# Altium PCB lab2_vodorezov_buck.PcbDoc
Units mm, origin at the board's own origin, x right, y up, seen from the top; angles counter-clockwise.
Board outline 77.5 x 40 mm, 2 copper layers (Top Layer, Bottom Layer), stack 1.57 mm thick; 32 components, 19 nets, 122 pads, 99 vias.
Unrouted connection lines stored in the file: 32.
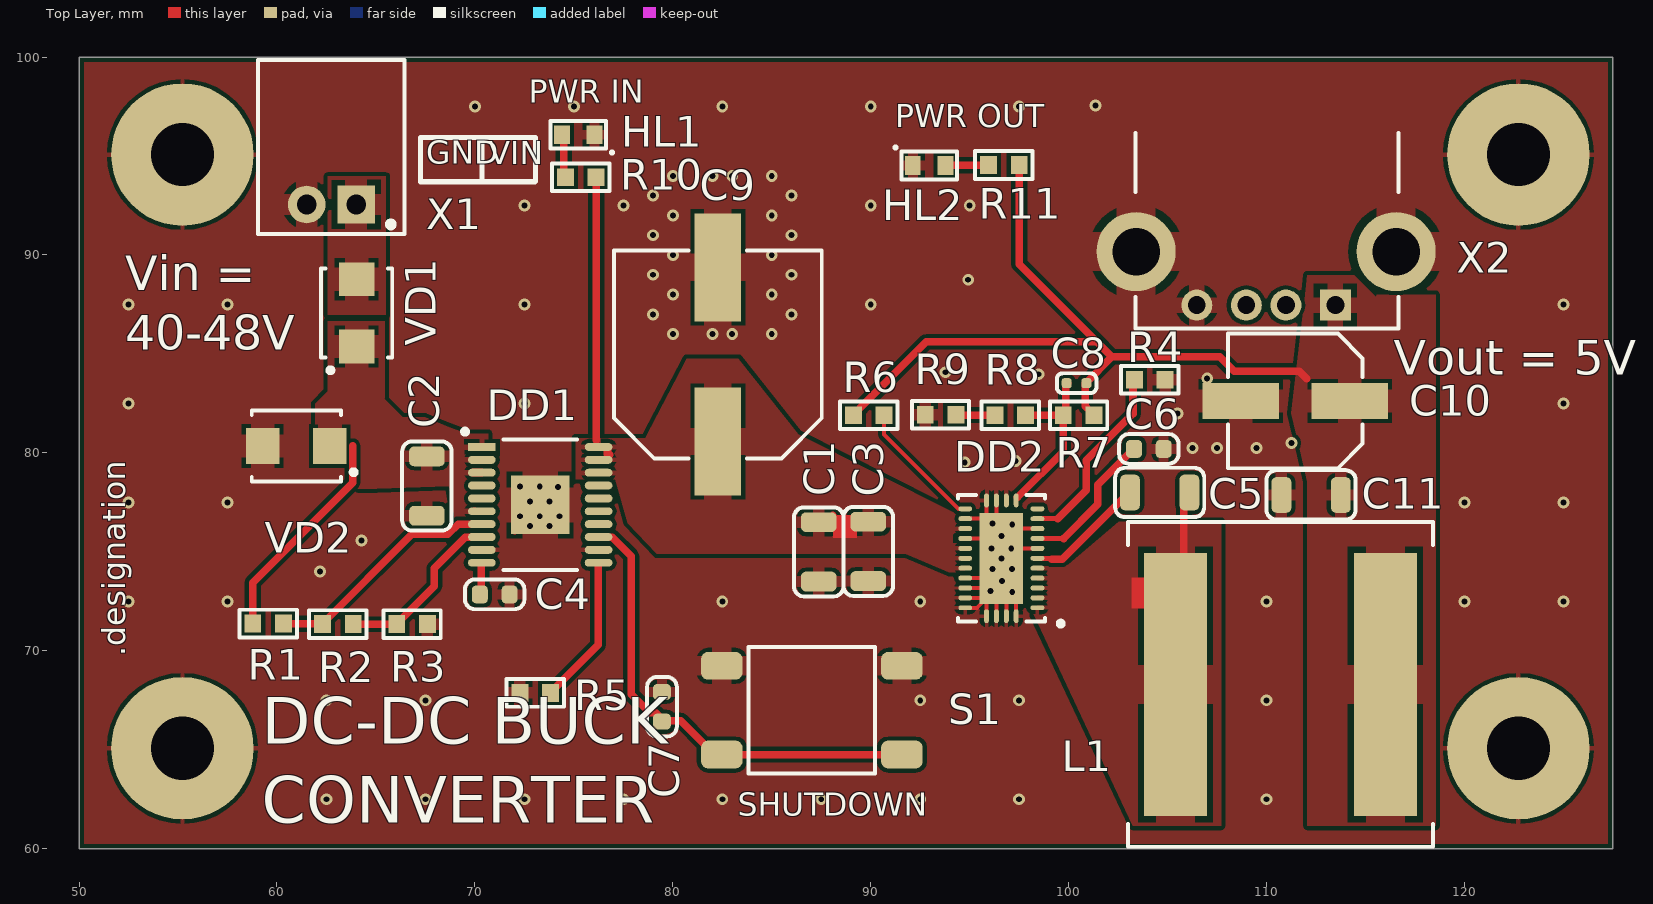
[diagram p0: Top Layer view]
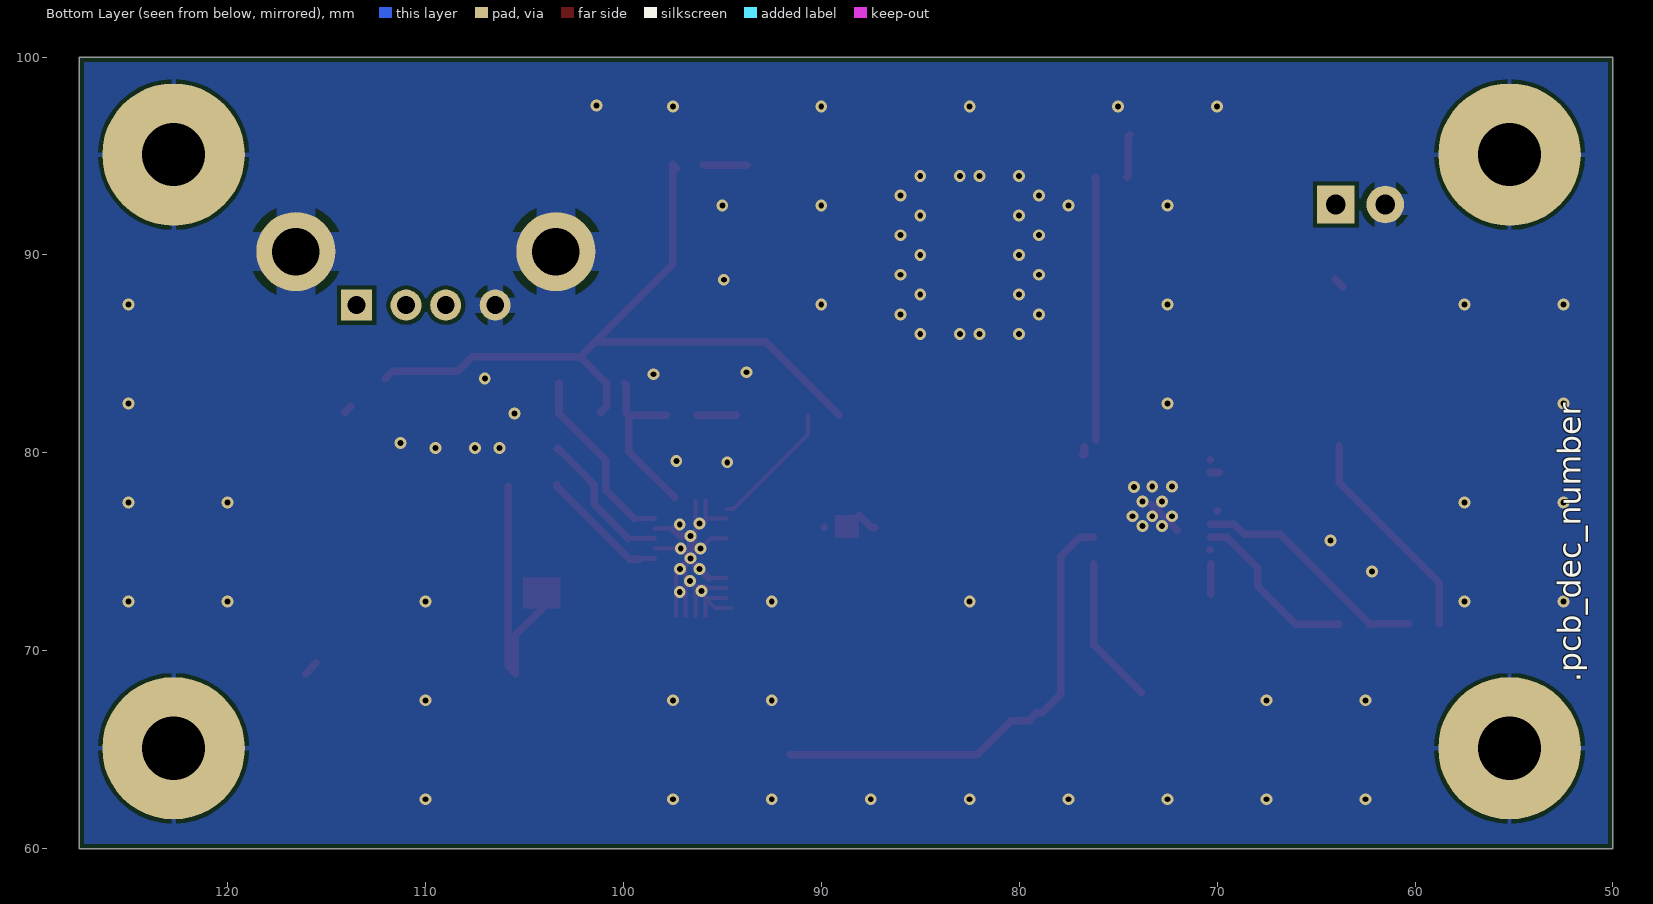
[diagram p1: Bottom Layer view, seen from below]
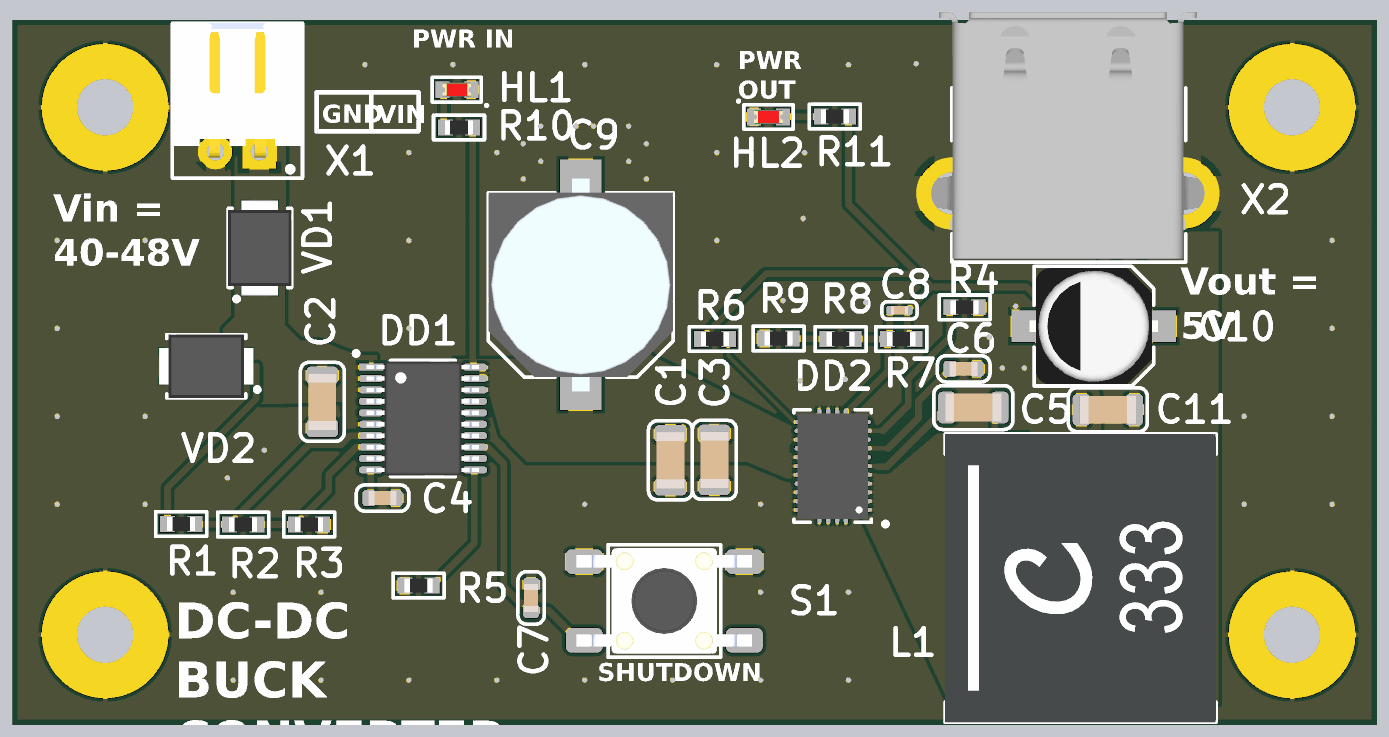
[diagram p2: 3D render of the assembled board from above, using the file's embedded part models]

## Layer stack, top to bottom
Top Solder: solder mask 0.0102, Solder Resist, Dk 3.5
Top Layer: signal copper 0.035
Core 1: core 1.5, FR4, Dk 4.6
Bottom Layer: signal copper 0.035
Bottom Solder: solder mask 0.0102, Solder Resist, Dk 3.5

## Board outline
50,60 127.5,60 127.5,100 50,100

## Design rules (kind name [scope] priority, off if disabled: settings)
AcuteAngle min_acute_angle [OnCopper] p1: minimum=3.50000000000000E+0001 checktracksonly=FALSE // Минимальный угол между примитивами топологии
BoardOutlineClearance board_outline_clearance_std [NOT (OnLayer('Bottom Overlay') OR OnLayer('Top Overlay'))] p1: gap=0.25 ignorepadtopadclearanceinfootprint=FALSE except(0: Arc-SplitContinuation Track-SplitContinuation SMDPad-SplitContinuation THPad-SplitContinuation Via-SplitContinuation Fill-SplitContinuation Poly-SplitContinuation Region-SplitContinuation Text-SplitContinuation) // Отступ элементов топологии от края фрезеруемой печатной платы
Clearance clearance_outer_35um_std [OnTopLayer OR OnBottomLayer] p1: gap=0.2 ignorepadtopadclearanceinfootprint=TRUE except(0.25: Arc-Hole Track-Hole SMDPad-Hole THPad-Hole Via-Hole Fill-Hole Poly-Hole Region-Hole Text-Hole) // Зазоры на внешних слоях
Clearance clearance_inner_35um_std [NOT (OnTopLayer Or OnBottomLayer)] p2: gap=0.2 ignorepadtopadclearanceinfootprint=FALSE except(0.25: Arc-Hole Track-Hole SMDPad-Hole THPad-Hole Via-Hole Fill-Hole Poly-Hole Region-Hole Text-Hole) // Зазоры на внутренних слоях
ComponentClearance [All] p1: gap=0 collisioncheckmode=3 verticalgap=0 showdistances=FALSE
DiffPairsRouting diff_pairs_routing [All] p1: maxlimit=0.127 minlimit=0.127 mostfreqgap=0.127 toplayer_minwidth=0.143 toplayer_maxwidth=0.143 toplayer_prefwidth=0.143 bottomlayer_minwidth=0.143 bottomlayer_maxwidth=0.143 bottomlayer_prefwidth=0.143 impedanceprofiledriven=TRUE impedanceprofileid={FD46899E-B5A2-4EF5-A302-5D2DB6A51F35} maxuncoupledlength=12.7 // Правила трассировки дифференциальных пар
HoleSize min_hole_size_std [IsPad] p1: absolutevalues=TRUE maxlimit=5.9 minlimit=0.6 maxpercent=80.000 minpercent=20.000 // Диаметр межслойного переходного отверстия
HoleSize min_hole_size_via_std [IsVia] p2: absolutevalues=TRUE maxlimit=5.9 minlimit=0.3 maxpercent=80.000 minpercent=20.000 // Минимальный диаметр монтажного отверстия
HoleToHoleClearance hole_to_hole_clearance_std [All] p1: gap=0.2 allowstackedmicrovias=FALSE // Минимальное расстояние между краями двух отверстий
MinimumAnnularRing min_via_ar_std [All] p1: minimumring=0.15 // Поясок площадки переходного отверстия (Annular ring VIA)
MinimumAnnularRing min_pad_ar_std [All] p2: minimumring=0.2 // Поясок монтажной контактной площадки (Annular ring PAD)
MinimumSolderMaskSliver min_solder_mask_bridge_std [All] p1: minsoldermaskwidth=0.15 // Мнимальная ширина масочного мостика
PlaneClearance plane_clearance_35um_std [All] p1: clearance=0.2 // Отступ полигона (для слоя plane) от элементов топологии
PlaneConnect [All] p1: planeconnectstyle=Relief reliefexpansion=0.5 reliefentries=4 reliefconductorwidth=0.2 reliefairgap=0.2
PolygonConnect poly_connect_to_pad<=0.3 [(AsMM(PadXSize_AllLayers)<=0.301) or (AsMM(PadYSize_AllLayers)<=0.301)] p1: thpad.connectstyle=Relief thpad.reliefconductorwidth=0.2 thpad.reliefentries=4 thpad.polygonreliefangle="90 Angle" thpad.airgapwidth=0.2 smdpad.connectstyle=Relief smdpad.reliefconductorwidth=0.2 smdpad.reliefentries=4 smdpad.polygonreliefangle="90 Angle" smdpad.airgapwidth=0.2 via.connectstyle=Direct via.reliefconductorwidth=0.254 via.reliefentries=4 via.polygonreliefangle="90 Angle" via.airgapwidth=0.254 // Правила подключения полигонов для падов от 0,3мм и меньше
PolygonConnect poly_connect_to_pad<=0.4 [(AsMM(PadXSize_AllLayers)<=0.401) or (AsMM(PadYSize_AllLayers)<=0.401)] p2: thpad.connectstyle=Relief thpad.reliefconductorwidth=0.26 thpad.reliefentries=4 thpad.polygonreliefangle="90 Angle" thpad.airgapwidth=0.2 smdpad.connectstyle=Relief smdpad.reliefconductorwidth=0.26 smdpad.reliefentries=4 smdpad.polygonreliefangle="90 Angle" smdpad.airgapwidth=0.2 via.connectstyle=Direct via.reliefconductorwidth=0.254 via.reliefentries=4 via.polygonreliefangle="90 Angle" via.airgapwidth=0.254 // Правила подключения полигонов для падов от 0,4 и меньше
PolygonConnect poly_connect_to_pad<=0.6 [(AsMM(PadXSize_AllLayers)<=0.601) or (AsMM(PadYSize_AllLayers)<=0.601)] p3: thpad.connectstyle=Relief thpad.reliefconductorwidth=0.33 thpad.reliefentries=4 thpad.polygonreliefangle="90 Angle" thpad.airgapwidth=0.2 smdpad.connectstyle=Relief smdpad.reliefconductorwidth=0.33 smdpad.reliefentries=4 smdpad.polygonreliefangle="90 Angle" smdpad.airgapwidth=0.2 via.connectstyle=Direct via.reliefconductorwidth=0.254 via.reliefentries=4 via.polygonreliefangle="90 Angle" via.airgapwidth=0.254 // Правила подключения полигонов для падов от 0,6мм и меньше
PolygonConnect poly_connect_to_pad<=0.7 [(AsMM(PadXSize_AllLayers)<=0.701) or (AsMM(PadYSize_AllLayers)<=0.701)] p4: thpad.connectstyle=Relief thpad.reliefconductorwidth=0.46 thpad.reliefentries=4 thpad.polygonreliefangle="90 Angle" thpad.airgapwidth=0.2 smdpad.connectstyle=Relief smdpad.reliefconductorwidth=0.46 smdpad.reliefentries=4 smdpad.polygonreliefangle="90 Angle" smdpad.airgapwidth=0.2 via.connectstyle=Direct via.reliefconductorwidth=0.254 via.reliefentries=4 via.polygonreliefangle="90 Angle" via.airgapwidth=0.254 // Правила подключения полигонов для падов от 0,7мм и меньше
PolygonConnect poly_connect_to_pad<=0.8 [(AsMM(PadXSize_AllLayers)<=0.8)or(AsMM(PadYSize_AllLayers)<=0.8)] p5: thpad.connectstyle=Relief thpad.reliefconductorwidth=0.53 thpad.reliefentries=4 thpad.polygonreliefangle="90 Angle" thpad.airgapwidth=0.3 smdpad.connectstyle=Relief smdpad.reliefconductorwidth=0.53 smdpad.reliefentries=4 smdpad.polygonreliefangle="90 Angle" smdpad.airgapwidth=0.2 via.connectstyle=Direct via.reliefconductorwidth=0.254 via.reliefentries=4 via.polygonreliefangle="90 Angle" via.airgapwidth=0.254 // Правила подключения полигонов для падов от 0,8мм и меньше
PolygonConnect poly_connect_to_pad<=1 [(AsMM(PadXSize_AllLayers)<=1.01)or(AsMM(PadYSize_AllLayers)<=1.01)] p6: thpad.connectstyle=Relief thpad.reliefconductorwidth=0.6 thpad.reliefentries=4 thpad.polygonreliefangle="90 Angle" thpad.airgapwidth=0.3 smdpad.connectstyle=Relief smdpad.reliefconductorwidth=0.6 smdpad.reliefentries=4 smdpad.polygonreliefangle="90 Angle" smdpad.airgapwidth=0.2 via.connectstyle=Direct via.reliefconductorwidth=0.254 via.reliefentries=4 via.polygonreliefangle="90 Angle" via.airgapwidth=0.254 // Правила подключения полигонов для падов от 1мм и меньше
PolygonConnect poly_connect_to_pad<=1.3 [(AsMM(PadXSize_AllLayers)<=1.31)or(AsMM(PadYSize_AllLayers)<=1.31)] p7: thpad.connectstyle=Relief thpad.reliefconductorwidth=0.66 thpad.reliefentries=4 thpad.polygonreliefangle="90 Angle" thpad.airgapwidth=0.3 smdpad.connectstyle=Relief smdpad.reliefconductorwidth=0.86 smdpad.reliefentries=4 smdpad.polygonreliefangle="90 Angle" smdpad.airgapwidth=0.2 via.connectstyle=Direct via.reliefconductorwidth=0.254 via.reliefentries=4 via.polygonreliefangle="90 Angle" via.airgapwidth=0.254 // Правила подключения полигонов для падов от 1,3мм и меньше
PolygonConnect poly_connect_to_pad<=1.6 [(AsMM(PadXSize_AllLayers)<=1.61)or(AsMM(PadYSize_AllLayers)<=1.61)] p8: thpad.connectstyle=Relief thpad.reliefconductorwidth=0.8 thpad.reliefentries=4 thpad.polygonreliefangle="90 Angle" thpad.airgapwidth=0.3 smdpad.connectstyle=Relief smdpad.reliefconductorwidth=1 smdpad.reliefentries=4 smdpad.polygonreliefangle="90 Angle" smdpad.airgapwidth=0.2 via.connectstyle=Direct via.reliefconductorwidth=0.254 via.reliefentries=4 via.polygonreliefangle="90 Angle" via.airgapwidth=0.254 // Правила подключения полигонов для падов от 1,6мм и меньше
PolygonConnect poly_connect_to_pad<=1.8 [(AsMM(PadXSize_AllLayers)<=1.8)or(AsMM(PadYSize_AllLayers)<=1.8)] p9: thpad.connectstyle=Relief thpad.reliefconductorwidth=1 thpad.reliefentries=4 thpad.polygonreliefangle="90 Angle" thpad.airgapwidth=0.3 smdpad.connectstyle=Relief smdpad.reliefconductorwidth=1.2 smdpad.reliefentries=4 smdpad.polygonreliefangle="90 Angle" smdpad.airgapwidth=0.2 via.connectstyle=Direct via.reliefconductorwidth=0.254 via.reliefentries=4 via.polygonreliefangle="90 Angle" via.airgapwidth=0.254 // Правила подключения полигонов для падов от 1,8мм и меньше
PolygonConnect poly_connect_to_pad<=2 [(AsMM(PadXSize_AllLayers)<=2.01)or(AsMM(PadYSize_AllLayers)<=2.01)] p10: thpad.connectstyle=Relief thpad.reliefconductorwidth=1.1 thpad.reliefentries=4 thpad.polygonreliefangle="90 Angle" thpad.airgapwidth=0.3 smdpad.connectstyle=Relief smdpad.reliefconductorwidth=1.4 smdpad.reliefentries=4 smdpad.polygonreliefangle="90 Angle" smdpad.airgapwidth=0.2 via.connectstyle=Direct via.reliefconductorwidth=0.254 via.reliefentries=4 via.polygonreliefangle="90 Angle" via.airgapwidth=0.254 // Правила подключения полигонов для падов от 2мм и меньше
PolygonConnect poly_connect_to_pad<=2.3 [(AsMM(PadXSize_AllLayers)<=2.31)or(AsMM(PadYSize_AllLayers)<=2.31)] p11: thpad.connectstyle=Relief thpad.reliefconductorwidth=1.2 thpad.reliefentries=4 thpad.polygonreliefangle="90 Angle" thpad.airgapwidth=0.3 smdpad.connectstyle=Relief smdpad.reliefconductorwidth=1.4 smdpad.reliefentries=4 smdpad.polygonreliefangle="90 Angle" smdpad.airgapwidth=0.2 via.connectstyle=Direct via.reliefconductorwidth=0.254 via.reliefentries=4 via.polygonreliefangle="90 Angle" via.airgapwidth=0.254 // Правила подключения полигонов для падов от 2,3мм и меньше
PolygonConnect poly_connect_to_pad<=2.5 [(AsMM(PadXSize_AllLayers)<=2.51)or(AsMM(PadYSize_AllLayers)<=2.51)] p12: thpad.connectstyle=Relief thpad.reliefconductorwidth=1.2 thpad.reliefentries=4 thpad.polygonreliefangle="90 Angle" thpad.airgapwidth=0.3 smdpad.connectstyle=Relief smdpad.reliefconductorwidth=1.4 smdpad.reliefentries=4 smdpad.polygonreliefangle="90 Angle" smdpad.airgapwidth=0.2 via.connectstyle=Direct via.reliefconductorwidth=0.254 via.reliefentries=4 via.polygonreliefangle="90 Angle" via.airgapwidth=0.254 // Правила подключения полигонов для падов от 2,5мм и меньше
PolygonConnect poly_connect_to_pad<=2.7 [(AsMM(PadXSize_AllLayers)<=2.71)or(AsMM(PadYSize_AllLayers)<=2.71)] p13: thpad.connectstyle=Relief thpad.reliefconductorwidth=1.4 thpad.reliefentries=4 thpad.polygonreliefangle="90 Angle" thpad.airgapwidth=0.3 smdpad.connectstyle=Relief smdpad.reliefconductorwidth=1.6 smdpad.reliefentries=4 smdpad.polygonreliefangle="90 Angle" smdpad.airgapwidth=0.2 via.connectstyle=Direct via.reliefconductorwidth=0.254 via.reliefentries=4 via.polygonreliefangle="90 Angle" via.airgapwidth=0.254 // Правила подключения полигонов для падов от 2,7мм и меньше
PolygonConnect poly_connect_to_pad<=3 [(AsMM(PadXSize_AllLayers)<=3.01)or(AsMM(PadYSize_AllLayers)<=3.01)] p14: thpad.connectstyle=Relief thpad.reliefconductorwidth=1.6 thpad.reliefentries=4 thpad.polygonreliefangle="90 Angle" thpad.airgapwidth=0.3 smdpad.connectstyle=Relief smdpad.reliefconductorwidth=1.8 smdpad.reliefentries=4 smdpad.polygonreliefangle="90 Angle" smdpad.airgapwidth=0.2 via.connectstyle=Direct via.reliefconductorwidth=0.254 via.reliefentries=4 via.polygonreliefangle="90 Angle" via.airgapwidth=0.254 // Правила подключения полигонов для падов от 3мм и меньше
PolygonConnect poly_connect_to_pad<=7 [(AsMM(PadXSize_AllLayers)<7.01)or(AsMM(PadYSize_AllLayers)<=7.01)] p15: thpad.connectstyle=Relief thpad.reliefconductorwidth=2 thpad.reliefentries=4 thpad.polygonreliefangle="90 Angle" thpad.airgapwidth=0.4 smdpad.connectstyle=Relief smdpad.reliefconductorwidth=2 smdpad.reliefentries=4 smdpad.polygonreliefangle="90 Angle" smdpad.airgapwidth=0.3 via.connectstyle=Direct via.reliefconductorwidth=0.254 via.reliefentries=4 via.polygonreliefangle="90 Angle" via.airgapwidth=0.254 // Правила подключения полигонов для падов от 7мм и меньше
PolygonConnect poly_connect_to_pad [All] p16: thpad.connectstyle=Relief thpad.reliefconductorwidth=0.25 thpad.reliefentries=4 thpad.polygonreliefangle="90 Angle" thpad.airgapwidth=0.2 smdpad.connectstyle=Relief smdpad.reliefconductorwidth=0.25 smdpad.reliefentries=4 smdpad.polygonreliefangle="90 Angle" smdpad.airgapwidth=0.2 via.connectstyle=Direct via.reliefconductorwidth=0.25 via.reliefentries=4 via.polygonreliefangle="90 Angle" via.airgapwidth=0.2 // Правила подключения полигонов общие
RoutingCorners [All] p1 off: cornerstyle=45-Degree minsetback=2.5 maxsetback=2.5
RoutingVias [All] p1: holewidth=0.3 width=0.6 viastyle="Through Hole" minholewidth=0.3 minwidth=0.6 maxholewidth=5.9 maxwidth=6.4
SilkToSilkClearance silk_to_silk_clearance_std [All] p1 off: silktosilkclearance=0.15 // Отступ текста шелкографии от других примитивов шелкографии
SilkToSolderMaskClearance silk_to_solder_mask_clearance_std [IsPad] p1 off: minsilkscreentomaskgap=0.15 clearancetoexposedcopper=FALSE // Минимальное расстояние между элементами шелкографии и вскрытой медью
SolderMaskExpansion solder_mask_expansion_std [All] p1: expansion=0.05 // Припуск паяльной масски
UnRoutedNet [All] p1: checkbadconnections=TRUE
Width width_35um_std [All] p1: maxlimit=10 minlimit=0.2 preferedwidth=0.2 checkconnectedcopper=TRUE // Ширина проводников (общая)
19 further rules are at their usual default settings.

## Components (designator, comment, footprint, x,y, rotation, side; value= is the part's Value field where it differs from the comment)
C1 "4,7 мк" C1206 87.375,75 r270 top
C2 "1 мк" C1206 67.575,78.325 r270 top
C3 "0,47 мк" C1206 89.875,75.025 r270 top
C4 "0,015 мк" C0603 71,72.85 r0 top
C5 "0,47 мк" C1206 104.6,78 r0 top
C6 "2,2 мк" C0603 104.05,80.2 r180 top
C7 "0,1 мк" C0603 79.45,67.175 r90 top
C8 "27" C0402 100.4,83.525 r0 top
C9 "47 мк" CAPAE-1000X1000X1200 82.275,84.975 r90 top
C10 "150 мк" CAPAE-660X660X580 111.45,82.625 r180 top
C11 "0,47 мк" C1206 112.25,77.875 r180 top
DD1 "TPS16630PWPR" HTSSOP-20 73.3,77.375 r0 top
DD2 "LM76005RNPR" WQFN-30 96.6,74.675 r180 top
HL1 "TLMS1000-GS08" HL0603 75.225,96.075 r180 top
HL2 "TLMS1000-GS08" HL0603 92.95,94.525 r0 top
L1 "XAL1510-333MEB" XAL-2-1620X1520X1100 110.7,68.3 r0 top
R1 "1,54 М" R0603 59.55,71.375 r180 top
R2 "8,06 к" R0603 63.075,71.35 r180 top
R3 "40,2 к" R0603 66.825,71.35 r180 top
R4 "97,6 к" R0603 104.1,83.7 r0 top
R5 "5,1 к" R0603 73.05,67.875 r180 top
R6 "100 к" R0603 89.9,81.9 r180 top
R7 "100 к" R0603 100.5,81.9 r0 top
R8 "13 к" R0603 97.05,81.9 r0 top
R9 "12 к" R0603 93.525,81.925 r0 top
R10 "3 к" R0603 75.35,93.925 r0 top
R11 "220" R0603 96.725,94.55 r0 top
S1 "FSM4JSMA" FSM4JSMA 87.025,67 r0 top
VD1 "BYS11-90" DO-214AC 64.025,87.075 r90 top
VD2 "1.5SMC62CA" DO-214AB 60.975,80.35 r180 top
X1 "DS1029-2-MRW6XB" DS1029-2-MRW6XB 62.75,95.7 r180 top
X2 "292303-5" 292303-5 109.975,93.475 r180 top

## Footprints (in the part's own frame and the unit in brackets; to place one, negate y for a bottom-side part, rotate by r counter-clockwise, add the part's x,y. Pads: shape width x height; smd on the part's side, far side on the other; paste and mask are expansions set on the pad)
292303-5 [mm]
  rect 1.57x1.57 hole 0.9: 1(-3.5,6.01)
  round 1.57 hole 0.9: 2(-1,6.01) 3(1,6.01) 4(3.5,6.01)
  round 4 hole 2.4: TP1(-6.57,3.3) TP1(6.57,3.3)
  silkscreen extent -6.7,-2.7 6.6,7.2, body extent -8.12,-7 8.12,7, height 7.77
C0402 [mm] "Chip Capacitor, 2-Leads, Body 1,00x0,50mm, IPC Medium Density"
  rrect50% 0.5x0.5 smd: 1(-0.5,0) 2(0.5,0)
  silkscreen extent -1,-0.5 1,0.5, body extent -0.5,-0.25 0.5,0.25, height 0.5
C0603 [mm] "Chip Capacitor, 2-Leads, Body 1,60x0,80mm, IPC Medium Density"
  rrect50% 0.8x0.9 smd: 1(-0.75,0) 2(0.75,0)
  silkscreen extent -1.5,-0.75 1.5,0.75, body extent -0.8,-0.4 0.8,0.4, height 0.8
C1206 [mm] "Chip Capacitor, 2-Leads, Body 3,20x1,60mm, IPC Medium Density"
  rrect50% 1x1.8 smd: 1(-1.5,0) 2(1.5,0)
  silkscreen extent -2.25,-1.25 2.25,1.25, body extent -1.6,-0.8 1.6,0.8, height 0.78
CAPAE-660X660X580 [mm] "Aluminum Electrolytic Capacitor, Body 6,60x6,60x6,10mm, IPC Low Density"
  rect 3.85x1.8 smd: 1(-2.75,0) 2(2.75,0)
  silkscreen extent -3.4,-3.4 3.4,3.4, body extent -3.65,-3.3 3.65,3.3, height 5.8
CAPAE-1000X1000X1200 [mm] "Aluminum Electrolytic Capacitor, Body 10,50x10,50x12,50mm, IPC Low Density"
  rect 5.45x2.35 smd: 1(-4.4,0) 2(4.4,0)
  silkscreen extent -5.25,-5.25 5.25,5.25, body extent -6.05,-5.25 6.05,5.25, height 12.5
DO-214AB [mm] "Molded Diode, 2-Leads, Body 6,86x5,91mm, IPC Medium Density"
  rect 1.7x1.8 smd: 1(-1.7,0) 2(1.7,0)
  silkscreen extent -3.03,-1.8 2.25,1.8, body extent -2.7,-1.81 2.7,1.81, height 2.43
DO-214AC [mm] "Molded Diode, 2-Leads, Body 4,25x2,67mm, IPC Medium Density"
  rect 1.7x1.8 smd: 1(-1.7,0) 2(1.7,0)
  silkscreen extent -3.02,-1.8 2.25,1.8, body extent -2.7,-1.81 2.7,1.81, height 2.43
DS1029-2-MRW6XB [mm]
  rect 1.9x1.9 hole 1: 1(-1.25,3.15)
  round 1.9 hole 1: 2(1.25,3.15)
  silkscreen extent -3.7,-4.15 3.7,4.65, body extent -3.7,-4.17 3.7,3.47, height 5.75
FSM4JSMA [mm]
  rrect50% 2.1x1.4 smd: 1(-4.55,2.24) 1(4.55,2.24) 2(-4.55,-2.24) 2(4.55,-2.24)
  silkscreen extent -3.2,-3.2 3.2,3.2, body extent -5,-3 5,3, height 5.13
HL0603 [mm] "Chip Diode, 2-Leads, Body 1,60x0,80mm, IPC Medium Density"
  rect 0.8x0.95 smd: 1(-0.825,0) 2(0.825,0)
  silkscreen extent -1.75,-0.7 1.4,0.95, body extent -0.81,-0.4 0.81,0.4, height 0.6
HTSSOP-20 [mm] "TSOP, 20-Leads, Body 6,50x4,40mm, Pitch 0,65mm, Thermal Pad 2,96x2,96mm, IPC Medium Density"
  rect 2.96x2.96 smd: 0(0,0)
  rect 1.4x0.4 smd: 1(-2.95,2.925)
  oval 1.4x0.4 smd: 2(-2.95,2.275) 3(-2.95,1.625) 4(-2.95,0.975) 5(-2.95,0.325) 6(-2.95,-0.325) 7(-2.95,-0.975) 8(-2.95,-1.625) 9(-2.95,-2.275) 10(-2.95,-2.925) 11(2.95,-2.925) 12(2.95,-2.275) 13(2.95,-1.625) 14(2.95,-0.975) 15(2.95,-0.325) 16(2.95,0.325) 17(2.95,0.975) 18(2.95,1.625) 19(2.95,2.275) 20(2.95,2.925)
  silkscreen extent -3.92,-3.3 1.85,3.82, body extent -3.2,-3.25 3.2,3.25, height 1.1
R0603 [mm] "Chip Resistor, 2-Leads, Body 1,60x0,80mm, IPC Medium Density"
  rect 0.85x0.9 smd: 1(-0.775,0) 2(0.775,0)
  silkscreen extent -1.45,-0.7 1.45,0.7, body extent -0.8,-0.4 0.8,0.4, height 0.45
WQFN-30 [mm] "QFN, 30-Leads, Body 4,00x6,00mm, Pitch 0,50mm, Thermal Pad 2,20x4,60mm, IPC Medium Density"
  rect 2.2x4.6 smd: 0(0,0)
  oval 0.7x0.25 smd: 1(-1.825,2.5) 2(-1.825,2) 3(-1.825,1.5) 4(-1.825,1) 5(-1.825,0.5) 6(-1.825,0) 7(-1.825,-0.5) 8(-1.825,-1) 9(-1.825,-1.5) 10(-1.825,-2) 11(-1.825,-2.5) 16(1.825,-2.5) 17(1.825,-2) 18(1.825,-1.5) 19(1.825,-1) 20(1.825,-0.5) 21(1.825,0) 22(1.825,0.5) 23(1.825,1) 24(1.825,1.5) 25(1.825,2) 26(1.825,2.5)
  oval 0.25x0.7 smd: 12(-0.75,-2.925) 13(-0.25,-2.925) 14(0.25,-2.925) 15(0.75,-2.925) 27(0.75,2.925) 28(0.25,2.925) 29(-0.25,2.925) 30(-0.75,2.925)
  silkscreen extent -3.13,-3.2 2.2,3.42, body extent -2,-3 2,3, height 0.8
XAL-2-1620X1520X1100 [mm] "Precision Wire Wound Inductor, 2-Leads, Body 16,20x15,20mm, IPC Medium Density"
  rect 3.18x13.3 smd: 1(-5.3,0) 2(5.3,0)
  silkscreen extent -7.7,-8.2 7.7,8.2, body extent -7.7,-8.2 7.7,8.2, height 10.7

## Part data
C1: library part c0087, "=Описание", HelpURL=https://www.yageo.com/upload/media/product/productsearch/datasheet/mlcc/UPY-GPHC_X7R_6.3V-to-50V_20.pdf, ID=c0087, Корпус=1206, Наименование=CC1206KRX7R9BB475, Напряжение="50 В", Номинал="4,7 мк", Номинальное напряжение="50 В", Описание="Конденсатор чип 1206 4,7 мкФ 50 В ±10 %", Отклонение="±10 %", Производитель="YAGEO Corp.", Рабочие температуры="от –55 °С до +125 °С", Температурный коэффициент емкости=X7R, Фамилия=Паньков
C2: library part c0068, "=Описание", HelpURL=https://www.yageo.com/upload/media/product/productsearch/datasheet/mlcc/UPY-NP0X7R_MV_100-to-630V_22.pdf, ID=c0068, Корпус=1206, Наименование=CC1206KKX7R0BB105, Напряжение="100 В", Номинал="1 мк", Номинальное напряжение="100 В", Описание="Конденсатор чип 1206 1 мкФ 100 В ±10 %", Отклонение="±10 %", Производитель="YAGEO Corp.", Рабочие температуры="от –55 °С до +125 °С", Температурный коэффициент емкости=X7R, Фамилия=Ларионов
C3 C5 C11: library part c0008, "=Описание", HelpURL=http://product.samsungsem.com/mlcc/CL31B474KCHWPN.do, ID=c0008, Корпус=1206, Наименование=CL31B474KCHWPNE, Напряжение="100 В", Номинал="0,47 мк", Номинальное напряжение="100 В", Описание="Конденсатор чип 1206 470 нФ 100 В ±10 %", Отклонение="±10 %", Производитель="Samsung electro-mechanics", Рабочие температуры="от –55 °С до +125 °С", Температурный коэффициент емкости=X7R, Фамилия=Водорезов
C4: library part c0023, "=Описание", HelpURL=https://www.yageo.com/upload/media/product/productsearch/datasheet/mlcc/UPY-GPHC_X7R_6.3V-to-50V_20.pdf, ID=c0023, Корпус=0603, Наименование=CC0603JPX7R9BB153, Напряжение="50 В", Номинал="0,015 мк", Номинальное напряжение="50 В", Описание="Конденсатор чип 0603 15 нФ 50 В ±5 %", Отклонение="±5 %", Производитель="YAGEO Corp.", Рабочие температуры="от –55 °С до +125 °С", Температурный коэффициент емкости=X7R, Фамилия=Жернаков
C6: library part c0073, "=Описание", HelpURL=https://www.yageo.com/upload/media/product/productsearch/datasheet/mlcc/UPY-GPHC_X5R_4V-to-50V_26.pdf, ID=c0073, Корпус=0603, Наименование=CC0603KRX5R9BB225, Напряжение="50 В", Номинал="2,2 мк", Номинальное напряжение="50 В", Описание="Конденсатор чип 0603 2,2 мкФ 50 В ±10 %", Отклонение="±10 %", Производитель="YAGEO Corp.", Рабочие температуры="от –55 °С до +85 °С", Температурный коэффициент емкости=X5R, Фамилия=Самарин
C7: library part c0018, "=Описание", HelpURL=https://www.yageo.com/upload/media/product/productsearch/datasheet/mlcc/UPY-NP0X7R_MV_100-to-630V_22.pdf, ID=c0018, Корпус=0603, Наименование=CC0603KRX7R0BB104, Напряжение="100 В", Номинал="0,1 мк", Номинальное напряжение="100 В", Описание="Конденсатор чип 0603 0,1 мкФ 100 В ±10 %", Отклонение="±10 %", Производитель="YAGEO Corp.", Рабочие температуры="от -55 °С до +125 °С", Фамилия=Ларионов
C8: library part c0001, "=Описание", HelpURL=http://product.samsungsem.com/mlcc/CL05C270JB5NNN.do, ID=c0001, Корпус=0402, Наименование=CL05C270JB5NNNC, Напряжение="50 В", Номинал=27, Номинальное напряжение="50 В", Описание="Конденсатор чип 0402 27 пФ 50 В ±5 %", Отклонение="±5 %", Производитель="Samsung electro-mechanics", Рабочие температуры="от –55 °С до +125 °С", Температурный коэффициент емкости=C0G, Фамилия=Соколов
C9: library part c0118, "=Описание", HelpURL=https://www.vishay.com/capacitors/list/product-28403/, ID=c0118, Корпус="CAPAE (10 x 10 x 12)", Наименование=MAL214699904E3, Напряжение="100 В", Номинал="47 мк", Номинальное напряжение="100 В", Описание="Конденсатор электролитический 47 мкФ 100 В ±20 %", Отклонение="±20 %", Производитель="Vishay Intertechnology, Inc.", Рабочие температуры="от –55 °С до +125 °С", Температурный коэффициент емкости=-, Фамилия=Ларионов
C10: library part c0120, "=Описание", HelpURL=https://industrial.panasonic.com/ww/products/capacitors/aluminum-capacitors/aluminum-cap-smd/models/EEEFK1A151AL, ID=c0120, Корпус="CAPAE (6,6 x 6,6 x 5,8)", Наименование=EEEFK1A151AL, Напряжение="10 В", Номинал="150 мк", Номинальное напряжение="10 В", Описание="Конденсатор электролитический 150 мкФ 10 В ±20 %", Отклонение="±20 %", Производитель="Panasonic Corporation", Рабочие температуры="от –55 °С до +105 °С", Температурный коэффициент емкости=-, Фамилия=Водорезов
DD1: library part dd0002, "=Описание", HelpURL=https://www.ti.com/product/TPS1663, ID=dd0002, Корпус=HTSSOP-20, Максимальное напряжение="67 В", Наименование=TPS16630PWPR, Напряжение="от 4,5 В до 60 В", Описание="Защитная микросхема eFuse 60 В и 6 А", Производитель="Texas Instruments", Рабочие температуры="от -40 °С до +125 °С", Ток="от 0,6 А до 6 А", Фамилия=Жернаков
DD2: library part dd0004, "=Описание", HelpURL=https://www.ti.com/product/LM76005, ID=dd0004, Входное напряжение="от 3,5 В до 60 В", Выходное напряжение="от 1 В до 57 В", Коммутируемый ток="от 0 А до 5 А", Корпус=WQFN-30, Наименование=LM76005RNPR, Описание="Понижающий преобразователь напряжения 60 В и 5 А", Производитель="Texas Instruments", Рабочие температуры="от -40 °С до +125 °С", Фамилия=Водорезов, Частота переключения="от 200 кГц до 500 КГц"
HL1 HL2: library part hl0001, "=Описание", HelpURL=https://www.vishay.com/leds/list/product-83172/, ID=hl0001, Корпус=0603, Наименование=TLMS1000-GS08, Номинальная длина волны="628 нм", Номинальная сила света="4 мкд", Номинальное падение напряжения="1,8 В", Номинальный прямой ток="15 мА", Описание="Светодиод чип 0603 красный", Производитель="Vishay Intertechnology, Inc.", Рабочие температуры="от -40 °С до +100 °С", Рассеиваемая мощность="40 мВт", Фамилия=Ларионов, Цвет=Red
L1: library part l0002, "=Описание", HelpURL=https://www.coilcraft.com/en-us/products/power/shielded-inductors/molded-inductor/xal/xal1510, ID=l0002, Индуктивность="33 мкГн", Корпус="16,2 x 15,2 x 11", Максимальное активное сопротивление="20 мОм", Наименование=XAL1510-333MEB, Номинал="33 мкГн", Номинальное активное сопротивление="18,7 мОм", Номинальный ток (при нагреве на 20 °С/40 °С)="8,6 А", Описание="Катушка индуктивности 33 мкГн ±20 %", Отклонение="±20 %", Производитель="Coilcraft Inc.", Рабочее напряжение="от 0 В до 60 В", Рабочие температуры="от –40 °С до +125 °С", Резонансная частота="5,8 МГц", Ток насыщения="16,7 А", Фамилия=Водорезов
R1: library part r0042, "=Описание", HelpURL=https://www.yageo.com/upload/media/product/productsearch/datasheet/rchip/PYu-RC_Group_51_RoHS_L_11.pdf, ID=r0042, Корпус=0603, Наименование=RC0603FR-071M54L, Номинал="1,54 М", Номинальное напряжение="75 В", Номинальный ток="1 А", Описание="Резистор чип 0603 1,54 МОм ±1 % 0,1 Вт", Отклонение="±1 %", Производитель="YAGEO Corp.", Рабочие температуры="от -55 °С до +155 °С", Фамилия=Жернаков
R2: library part r0020, "=Описание", HelpURL=https://www.yageo.com/upload/media/product/productsearch/datasheet/rchip/PYu-RC_Group_51_RoHS_L_11.pdf, ID=r0020, Корпус=0603, Наименование=RC0603FR-078K06L, Номинал="8,06 к", Номинальное напряжение="75 В", Номинальный ток="1 А", Описание="Резистор чип 0603 8,06 кОм ±1 % 0,1 Вт", Отклонение="±1 %", Производитель="YAGEO Corp.", Рабочие температуры="от -55 °С до +155 °С", Фамилия=Жернаков
R3: library part r0028, "=Описание", HelpURL=https://www.yageo.com/upload/media/product/productsearch/datasheet/rchip/PYu-RC_Group_51_RoHS_L_11.pdf, ID=r0028, Корпус=0603, Наименование=RC0603FR-0740K2L, Номинал="40,2 к", Номинальное напряжение="75 В", Номинальный ток="1 А", Описание="Резистор чип 0603 40,2 кОм ±1 % 0,1 Вт", Отклонение="±1 %", Производитель="YAGEO Corp.", Рабочие температуры="от -55 °С до +155 °С", Фамилия=Жернаков
R4: library part r0024, "=Описание", HelpURL=https://www.yageo.com/upload/media/product/productsearch/datasheet/rchip/PYu-RC_Group_51_RoHS_L_11.pdf, ID=r0024, Корпус=0603, Наименование=RC0603FR-0797K6L, Номинал="97,6 к", Номинальное напряжение="75 В", Номинальный ток="1 А", Описание="Резистор чип 0603 97.6 кОм ±1 % 0,2 Вт", Отклонение="±1 %", Производитель="YAGEO Corp.", Рабочие температуры="от -55 °С до +155 °С", Фамилия=Водорезов
R5: library part r0019, "=Описание", HelpURL=https://www.yageo.com/upload/media/product/productsearch/datasheet/rchip/PYu-RC_Group_51_RoHS_L_11.pdf, ID=r0019, Корпус=0603, Наименование=RC0603FR-075K1L, Номинал="5,1 к", Номинальное напряжение="75 В", Номинальный ток="1 А", Описание="Резистор чип 0603 5,1 кОм ±1 % 0,1 Вт", Отклонение="±1 %", Производитель="YAGEO Corp.", Рабочие температуры="от -55 °С до +155 °С", Фамилия=Жернаков
R6 R7: library part r0023, "=Описание", HelpURL=https://www.yageo.com/upload/media/product/productsearch/datasheet/rchip/PYu-RC_Group_51_RoHS_L_11.pdf, ID=r0023, Корпус=0603, Наименование=RC0603FR-07100KL, Номинал="100 к", Номинальное напряжение="75 В", Номинальный ток="1 А", Описание="Резистор чип 0603 100 кОм ±1 % 0,2 Вт", Отклонение="±1 %", Производитель="YAGEO Corp.", Рабочие температуры="от -55 °С до +155 °С", Фамилия=Водорезов
R8: library part r0016, "=Описание", HelpURL=https://www.yageo.com/upload/media/product/productsearch/datasheet/rchip/PYu-RC_Group_51_RoHS_L_11.pdf, ID=r0016, Корпус=0603, Наименование=RC0603FR-0713KL, Номинал="13 к", Номинальное напряжение="75 В", Номинальный ток="1 А", Описание="Резистор чип 0603 13 кОм ±1 % 0,1 Вт", Отклонение="±1 %", Производитель="YAGEO Corp.", Рабочие температуры="от -55 °С до +155 °С", Фамилия=Жернаков
R9 R10: library part r0015, "=Описание", ID=r0015, Корпус=0603, Номинальное напряжение="75 В", Номинальный ток="1 А", Отклонение="±1 %", Производитель="YAGEO Corp.", Рабочие температуры="от -55 °С до +155 °С"
  R9: HelpURL=https://www.yageo.com/upload/media/product/productsearch/datasheet/rchip/PYu-AC_51_RoHS_L_7.pdf, Наименование=AC0603FR-1012KL, Номинал="12 к", Описание="Резистор чип 0603 12 кОм ±1 % 0,1 Вт", Фамилия=Соколов
  R10: HelpURL=https://www.yageo.com/upload/media/product/productsearch/datasheet/rchip/PYu-RC_Group_51_RoHS_L_11.pdf, Наименование=RC0603FR-073KL, Номинал="3 к", Описание="Резистор чип 0603 3 кОм ±1 % 0,1 Вт", Фамилия=Ларионов
R11: library part r0009, "=Описание", HelpURL=https://www.yageo.com/upload/media/product/productsearch/datasheet/rchip/PYu-RC_Group_51_RoHS_L_11.pdf, ID=r0009, Корпус=0603, Наименование=RC0603FR-07220RL, Номинал=220, Номинальное напряжение="75 В", Номинальный ток="1 А", Описание="Резистор чип 0603 220 Ом ±1 % 0,1 Вт", Отклонение="±1 %", Производитель="YAGEO Corp.", Рабочие температуры="от -55 °С до +155 °С", Фамилия=Ларионов
S1: library part sw0002, "=Описание", HelpURL=https://www.te.com/usa-en/product-4-1437565-1.html, ID=sw0002, Количество контактов=1, Корпус=6,00x6,00x4,98, Наименование=FSM4JSMA, Описание="Тактовая кнопка поверхностного монтажа", Производитель="TE Connectivity", Промывка=Разрешена, Рабочие температуры="от -35 °С до +85 °С", Сопротивление контакта="100 мОм", Ток нагрузки="50 мА @ 24 В", Фамилия=Паньков
VD1: library part vd0005, "=Описание", ID=vd0005, Импульсное обратное напряжение="90 В", Корпус=DO-214AC, Макс допустимый средний прямой ток="1,5 А", Наименование=BYS11-90, Описание="Диод Шоттки 90 В 1,5 А", Пиковое прямое напряжение="0,75 В", Производитель="Vishay Intertechnology, Inc.", Рабочие температуры="от -55 °С до +125 °С", Фамилия=Водорезов
VD2: library part vd0004, "=Описание", HelpURL=https://www.littelfuse.com/products/tvs-diodes/surface-mount/1_5smc.aspx, ID=vd0004, Корпус=DO-214AB, Наименование=1.5SMC62CA, Описание="Двунаправленная диодная сборка для подавления помех, 53 В", Производитель="Littelfuse, Inc.", Фамилия=Ларионов
X1: library part x0006, "=Описание", Contact_1=VIN, Contact_2=GND, HelpURL=http://www.connfly.com/productshow.aspx?id=352, ID=x0006, Наименование=DS1029-2-MRW6XB, Описание="CWF 2 pin Type B 2,5 мм вилка угловой", Производитель="Connfly Electronic Co. LTD.", Фамилия=Ларионов
X2: library part x0003, "=Описание", Contact_1=+5V, Contact_2=NC, Contact_3=NC, Contact_4=GND, HelpURL=https://www.te.com/usa-en/product-292303-5.html, ID=x0003, Наименование=292303-5, Описание="USB 2.0 Type A гнездо", Производитель="TE Connectivity", Фамилия=Ларионов

## Free pads (board coordinates)
  round 7.2 hole 3.2: 2(55.225,65.075) 2(55.225,95.075) 2(122.725,65.075) 2(122.725,95.075)

## Via types
v1: diameter 0.6/0.6 (per signal layer), hole 0.3, Top Layer to Bottom Layer, tented both sides, 99 vias

## Nets (pads, with @x,y where several pads share a name; then routed paths per layer and width w, separated by ;. In a path a pad name is that pad's centre, name@x,y a point inside that pad or via, vN(x,y) a via of type N, cw(c..) or ccw(c..) an arc to the next point about the centre after c; other vN are vias at no path point)
+5V: C8.2 C10.1 C11.1 L1.2 R6.2 R7.2 R11.2 X2.1 | length 40.7
  Top Layer w0.381: R6.2 89.125,81.925 92.805,85.605 101.43,85.605 ; R11.2@97.33,94.38 R11.2 97.5,89.535 101.43,85.605 ; R7.2@101.145,82.03 101.145,82.055 100.84,82.36 100.84,83.525 100.86,83.525 102.185,84.85 ; 112.025,83.75 111.65,84.125 108.355,84.125 107.63,84.85 102.185,84.85 ; C10.1@113.765,82.36 C10.1@114.075,82.05 ; L1.2@115.53,69.37 L1.2@116.05,68.85 ; 101.43,85.605 102.185,84.85
GND: C1.2 C2.2 C3.2 C4.2 C6.1 C7.2 C9.2 C10.2 C11.2 DD1.0 DD1.9 DD1.12 DD2.0 DD2.7 DD2.9 DD2.13 DD2.14 DD2.15 DD2.17 DD2.19 DD2.23 DD2.24 DD2.25 DD2.26 DD2.27 DD2.28 DD2.29 DD2.30 HL1.1 HL2.1 pad.2 R3.1 R4.2 R5.2 R9.1 S1.1 VD2.2 X1.2 X2.4 X2.TP1 | length 28
  Top Layer w0.2: DD2.26@94.537,72.175 95.375,72.175 96.056,72.856 v1(96.056,73.016) ; DD2.25 95.85,72.675 DD2.27 ; DD2.24 DD2.0@95.85,73.175 ; DD2.23 DD2.0@95.69,73.675 ; DD2.19 95.6,75.675 v1(96.6,74.675) ; DD2.17 95.733,76.675 95.85,76.558 DD2.15 ; DD2.28 DD2.0@96.35,73.087 ; DD2.0@96.35,75.315 DD2.14 ; DD2.29 DD2.0@96.85,74.425 ; v1(97.1,75.175) DD2.7 ; DD2.30 DD2.0@97.35,73.925 ; DD2.0@97.51,76.175 DD2.9
  Top Layer w0.381: DD1.9 DD1.9@70.363,75.113 ; DD1.0@72.01,76.065 72.01,76.086 DD1.0 ; DD2.0@95.69,73.675 96.6,74.584 v1(96.6,74.675) ; DD2.0@95.85,73.175 DD2.0@96.262,73.175 ; DD2.0@96.85,74.425 v1(97.137,74.137) ; v1(97.1,75.175) v1(96.6,74.675) ; DD2.0@97.51,76.175 97.134,75.8 v1(96.6,75.8) v1(96.6,74.675)
  other v1: 62.5,62.5 67.5,62.5 72.5,62.5 77.5,62.5 82.5,62.5 87.5,62.5 92.5,62.5 97.5,62.5 110,62.5 62.5,67.5 67.5,67.5 92.5,67.5 97.5,67.5 110,67.5 52.5,72.5 57.5,72.5 82.5,72.5 92.5,72.5 110,72.5 120,72.5 125,72.5 97.15,72.975 96.625,73.525 62.175,74 96.145,74.13 96.1,75.175 64.275,75.575 72.775,76.3 73.775,76.3 97.15,76.375 96.15,76.425 72.275,76.8 73.275,76.8 74.275,76.8 52.5,77.5 57.5,77.5 120,77.5 125,77.5 72.775,77.55 73.775,77.55 74.2,78.275 72.275,78.3 73.275,78.3 94.75,79.525 97.325,79.6 106.25,80.25 107.5,80.25 109.5,80.25 111.25,80.5 105.5,82 52.5,82.5 72.5,82.5 125,82.5 107,83.75 98.475,83.975 93.775,84.075 80,86 82,86 83,86 85,86 79,87 86,87 52.5,87.5 57.5,87.5 72.5,87.5 90,87.5 125,87.5 80,88 85,88 94.925,88.75 79,89 86,89 80,90 85,90 79,91 86,91 80,92 85,92 72.5,92.5 77.5,92.5 90,92.5 95,92.5 79,93 86,93 80,94 82,94 83,94 85,94 70,97.5 75,97.5 82.5,97.5 90,97.5 97.5,97.5 101.35,97.55
NetC4_1: C4.1 DD1.10 | length 1.6
  Top Layer w0.381: C4.1@70.3,72.85 70.325,72.875 DD1.10@70.325,74.4
NetC5_1: DD2.6
NetC5_2: C5.2 DD2.1 DD2.2 DD2.3 DD2.4 DD2.5 L1.1 | length 13.5
  Top Layer w0.381: L1.1@104.05,72.175 105.45,70.775 105.45,68.85 105.825,69.225 C5.2@105.825,78.325
NetC6_2: C6.2 DD2.8 | length 7.4
  Top Layer w0.25: DD2.8 99.75,75.675
  Top Layer w0.381: 99.75,75.675 101.481,77.406 101.481,78.383 C6.2@103.298,80.2 ; C6.2@103.275,80.2 C6.2@103.298,80.2 ; C6.2@103.324,80.226 C6.2@103.298,80.2 ; C6.2@103.35,80.2 C6.2@103.298,80.2
NetC7_1: C7.1 DD1.13 S1.2 | length 24
  Top Layer w0.381: DD1.13 76.254,75.746 76.939,75.746 77.897,74.788 77.897,67.801 78.838,66.86 79.14,66.86 79.45,66.55 79.45,66.475 80.41,66.475 82.125,64.76 82.475,64.76 S1.2@91.575,64.76
NetC8_1: C8.1 DD2.12 R7.1 R8.2 | length 8.7
  Top Layer w0.381: DD2.12@97.415,77.76 99.725,80.069 R7.1 ; R8.2 R7.1 ; C8.1@99.96,83.525 99.843,83.407 99.843,82.017 R7.1
NetDD1_7: DD1.7 R1.1 R2.2 | length 12.1
  Top Layer w0.381: R1.1 60.337,71.363 62.287,71.363 R2.2 62.3,71.375 66.809,75.884 68.637,75.884 69.149,76.396 70.346,76.396 DD1.7
NetDD1_8: DD1.8 R2.1 R3.2 | length 8.9
  Top Layer w0.381: R2.1@63.862,71.362 R2.1 R3.2 66.05,71.375 67.94,73.265 67.94,74.165 69.521,75.746 70.346,75.746 DD1.8
NetDD1_11: DD1.11 R5.1 | length 7.5
  Top Layer w0.381: R5.1 73.825,67.9 76.225,70.3 DD1.11@76.225,74.4
NetDD2_10: DD2.10 R4.1 | length 9.4
  Top Layer w0.25: DD2.10 99.45,76.675
  Top Layer w0.381: 99.45,76.675 100.9,78.125 100.9,79.625 103.25,81.975 R4.1@103.25,83.525
NetDD2_16: DD2.16 R6.1 | length 6.6
  Top Layer w0.2: R6.1 90.675,80.925 94.425,77.175 DD2.16
NetHL1_2: HL1.2 R10.1 | length 2.2
  Top Layer w0.381: HL1.2 74.487,95.987 74.487,94.012 R10.1
NetHL2_2: HL2.2 R11.1 | length 2.2
  Top Layer w0.381: HL2.2 93.788,94.537 95.938,94.537 R11.1
NetR8_1: R8.1 R9.2 | length 2
  Top Layer w0.381: R9.2 94.313,81.913 96.263,81.913 R8.1
NetVD1_2: VD1.2 X1.1 | length 0.5
  Top Layer w0.381: VD1.2@63.64,88.39 VD1.2
VIN_CONN: C2.1 DD1.1 DD1.2 DD1.3 DD1.6 R1.2 VD1.1 VD2.1 | length 12
  Top Layer w0.381: R1.2 58.775,73.45 63.825,78.5 63.825,80.35 ; DD1.3@69.894,79 DD1.3 70.337,79.013 DD1.3@69.894,79.013 ; DD1.6@69.976,77.05 DD1.6@69.989,77.063 ; DD1.2@70.337,79.663 DD1.2
VIN_CONN_PROT: C1.1 C3.1 C9.1 DD1.18 DD1.19 DD1.20 DD2.18 DD2.20 DD2.21 DD2.22 R10.2 | length 14.9
  Top Layer w0.381: 76.125,80.65 R10.2 R10.2@76.175,93.875 ; DD1.20@76.7,80.3 76.7,79.932 76.732,79.9 76.8,79.9 ; C1.1@87.3,76.225 87.375,76.225 87.45,76.225 C1.1@88.084,76.859
pads on no net: C5.1 DD1.4 DD1.5 DD1.14 DD1.15 DD1.16 DD1.17 DD2.11 X2.2 X2.3
copper on no net: | length 6.6
  Top Layer w0.25: 98.425,74.675 99.15,74.675
  Top Layer w0.381: 99.15,74.625 99.675,74.625 103.375,78.325 103.375,78.4

## Polygon pours and split planes (outlines as drawn)
GND on Top Layer "GND_L01_P056" (solid, pour order 56): 49.25,89.45 49.25,100.8 128.6,100.8 128.775,100.625 127.9,99.75 127.9,59.425 49.5,59.425 49.425,59.35
+5V on Top Layer "+5V_L01_P052" (solid, pour order 52): 111.25,82 112.057,88.975 114.425,88.975 115.925,87.475 115.4,88 118.54,88 118.54,61.15 112.057,61.15 112.057,78.55
NetC5_2 on Top Layer "NETC5_2_L01_P050" (solid, pour order 50): 97.925,74.375 99.913,74.312 102.525,76.525 107.7,76.525 107.7,61.15 103.245,61.15 98.225,71.85
VIN_CONN_PROT on Top Layer "Connector" (solid, pour order 44): 75.1,80.75 75.1,80.675 75.1,78.675 77.1,78.675 77.725,76.45 79.2,74.9 91.75,74.9 93.95,73.975 95.35,73.975 95.35,75.45 95.325,75.475 95.275,75.425 94.15,75.425 94.15,75.875 94.25,75.975 95.275,75.975 95.275,76.425 95.25,76.45 86.325,80.95 83.315,84.765 80.715,84.765 78.6,80.75
VIN_CONN on Top Layer "Connector" (solid, pour order 42): 62.575,86.65 65.45,86.65 65.45,82.75 65.425,82.725 66.35,81.8 67.5,81.8 68.7,81.3 69.625,80.975 70.675,80.975 70.675,76.695 68.95,76.75 68.7,78.325 65.05,78.2 61.925,78.2 61.925,82.475 62.575,83.125
no net on Top Layer "Connector" (solid, pour order 48): 75.75,80.6
no net on Top Layer "Connector" (solid, pour order 46): 75.4,80.7
NetVD1_2 on Top Layer "Connector" (solid, remove dead copper, pour order 34): 62.575,93.975 65.5,93.975 65.5,86.975 62.575,86.975
GND on Top Layer "Top Layer-GND" (solid, pour order 28): 136.6,85.35
GND on Top Layer "Top Layer-GND" (solid, pour order 24): 125.675,55.85
GND on Top Layer "Top Layer-GND" (solid, pour order 6): 74.125,104.25
GND on Top Layer "Top Layer-GND" (solid, pour order 2): 104.225,58.825
GND on Bottom Layer "Top Layer-GND" (solid, pour order 30): 49.775,59.975 49.775,100.4 49.875,100.5 127.875,100.5 127.875,60.175 127.775,60.075
GND on Bottom Layer "Top Layer-GND" (solid, pour order 20): 55.375,104.55
GND on Bottom Layer "Top Layer-GND" (solid, pour order 16): 108.575,115.95

## Other copper
Top Layer:
  rectangle net NetC5_2: 103.175,72.15 105.075,73.7
  rectangle net VIN_CONN_PROT: 88.1,75.7 89.3,76.875

## Silkscreen, mask and mechanical layers (free items; w line width, h text height)
Top Overlay:
  lines w0.254: 70.35,93.7 70.35,95.8 ; 67.25,93.7 73.025,93.7 73.05,93.725 73.05,95.925 67.25,95.925 67.25,93.7
  text "PWR IN" at 72.725,97.275 h2
  text "PWR OUT" at 91.25,96.05 h2
  text "GND" at 67.55,94.2 h2
  text "VIN" at 70.7,94.175 h2
  text "Vin = / 40-48V" at 52.325,84.625 h3
  text "Vout = 5V" at 116.425,83.375 h3
  text ".designation" at 52.75,69.725 h2 r90
  text "SHUTDOWN" at 83.275,61.25 h2
  text "DC-DC BUCK  / CONVERTER" at 59.225,60.525 h4
Bottom Overlay:
  text ".pcb_dec_number" at 51.225,68.4 h2 r270
Board:
  the board outline again, w0.1
Assembly Notes (Mech5):
  text "'.title'" at 50,47.5 h2
  text "'.project'_'.pcb_dec_number'['.Pcb_File_Name_No_Path']" at 50,45 h2